# Altium PCB PCB1.PcbDoc
Units mm, origin at the board's own origin, x right, y up, seen from the top; angles counter-clockwise.
Board outline 75 x 14 mm, 4 copper layers (Top, Gnd, Power, Bottom), stack 0.828 mm thick; 26 components, 13 nets, 144 pads, 0 vias.
Unrouted connection lines stored in the file: 61.
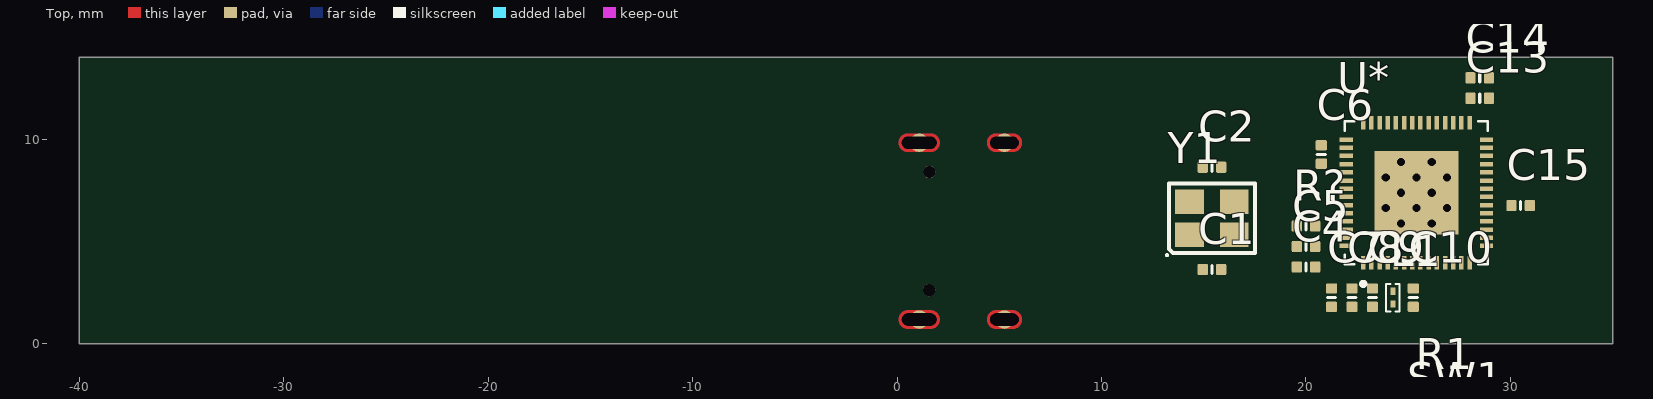
[diagram p0: Top view]
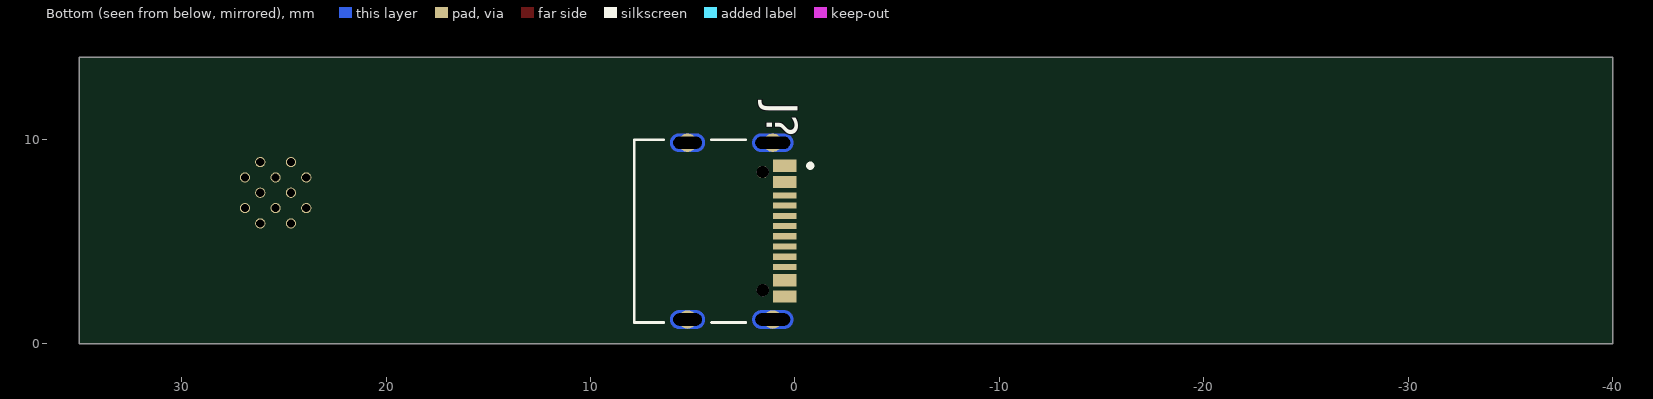
[diagram p1: Bottom view, seen from below]

## Layer stack, top to bottom
Top Solder: solder mask 0.0102, Solder Resist, Dk 4
Top: signal copper 0.0203
Dielectric 2: prepreg 0.2032, PP-006, Dk 4.39
Gnd: signal copper 0.0305
Dielectric 1: dielectric 0.32, FR-4, Dk 4.43
Power: signal copper 0.0305
Dielectric 3: prepreg 0.2032, PP-006, Dk 4.39
Bottom: signal copper 0.0203
Bottom Solder: solder mask 0.0102, Solder Resist, Dk 4

## Board outline
-40,0 35,0 35,14 -40,14

## Design rules (kind name [scope] priority, off if disabled: settings)
Clearance [All] p1: gap=0.254 ignorepadtopadclearanceinfootprint=FALSE except(0: Arc-Hole Track-Hole SMDPad-Hole THPad-Hole Via-Hole Fill-Hole Poly-Hole Region-Hole Text-Hole)
PolygonConnect [All] p1: connectstyle=Relief reliefconductorwidth=0.254 reliefentries=4 polygonreliefangle="90 Angle" airgapwidth=0.254
RoomDefinition Components [InComponentClass('Components')] p1: confinementstyle=ConfineIn formatcopy=TRUE lockcomponents=FALSE outline -140,-80 -89.2,-80 -89.2,-54.6 -140,-54.6
RoutingVias [All] p1: holewidth=0.711 width=1.27 viastyle="Through Hole" minholewidth=0.711 minwidth=1.27 maxholewidth=0.711 maxwidth=1.27
SolderMaskExpansion [All] p1: expansion=0.102 istentingtop=FALSE
Width [All] p1: maxlimit=0.254 minlimit=0.254 preferedwidth=0.254
30 further rules are at their usual default settings.

## Classes and differential pairs
component class Components: J? U?

## Components (designator, comment, footprint, x,y, rotation, side; value= is the part's Value field where it differs from the comment)
C1 "Capacitor 12pF +/-10% 50V 0402" CAPC0402(1005)33_L 15.401,3.627 r0 top value=12pF
C2 "Capacitor 12pF +/-10% 50V 0402" CAPC0402(1005)33_L 15.401,8.627 r0 top value=12pF
C3 "Capacitor 1µF +/-20% 10V 0402" CAPC0402(1005)60_L 27,-9.5 r0 top value=1µF
C4 "Capacitor 1µF +/-20% 10V 0402" CAPC0402(1005)60_L 20,3.75 r180 top value=1µF
C5 "Capacitor 100nF +/-20% 10V 0402" CAPC0402(1005)60_L 20,4.75 r180 top value=100nF
C6 "Capacitor 1µF +/-20% 10V 0402" CAPC0402(1005)60_L 20.75,9.25 r90 top value=1µF
C7 "Capacitor 10µF +/-40% 6.3V 0402" CAPC0402(1005)60_L 21.25,2.25 r270 top value=10µF
C8 "Capacitor 1µF +/-20% 10V 0402" CAPC0402(1005)60_L 22.25,2.25 r270 top value=1µF
C9 "Capacitor 100nF +/-20% 10V 0402" CAPC0402(1005)60_L 23.25,2.25 r270 top value=100nF
C10 "Capacitor 100nF +/-20% 10V 0402" CAPC0402(1005)60_L 25.25,2.25 r270 top value=100nF
C11 "Capacitor 0.1 uF +/- 5% 16 V 0402" CAPC1005X56X25LL10T15 -5.75,17.25 r90 top value=3.3pF
C12 "Capacitor 0.1 uF +/- 5% 16 V 0402" CAPC1005X56X25LL10T15 -3.5,17.25 r90 top value=3.3pF
C13 "Capacitor 1µF +/-20% 10V 0402" CAPC0402(1005)60_L 28.5,12 r0 top value=1µF
C14 "Capacitor 100nF +/-20% 10V 0402" CAPC0402(1005)60_L 28.5,13 r0 top value=100nF
C15 "Capacitor 100nF +/-20% 10V 0402" CAPC0402(1005)60_L 30.5,6.75 r0 top value=100nF
E1 "2450AT18A100E" JT-2450AT18A100-2_V -9.5,18.75 r90 top
J? "TYPE-C-31-M-12" HRO_TYPE-C-31-M-12 5.25,5.5 r270 bottom
L1 "2 nH" "IND 0201_0603" 24.25,2.25 r270 top
L2 "2nH" "IND 0201_0603" -4.5,19 r0 top value="2 nH"
R1 "10KR2F" RESC0402(1005)_L 26,-2.5 r180 top value=10k
R? "0R2J" RESC0402(1005)_L 20,5.75 r0 top value=0
SW1 "PTS810SJM250SMTRLFS" FP-PTS810SJM250SMTRLFS-MFG 26.5,-6 r90 top
SW2 "PTS810SJM250SMTRLFS" FP-PTS810SJM250SMTRLFS-MFG 45.217,-19.163 r90 top
U* "ESP32-S3FN8" PCBComponent_1 25.401,7.377 r90 top
U? "AP2112K-3.3TRG1" FP-SOT25-IPC_A 39.5,22.25 r0 top
Y1 "40 MHz" "NDK NX3225SA" 15.401,6.127 r0 top

## Footprints (in the part's own frame and the unit in brackets; to place one, negate y for a bottom-side part, rotate by r counter-clockwise, add the part's x,y. Pads: shape width x height; smd on the part's side, far side on the other; paste and mask are expansions set on the pad)
CAPC0402(1005)33_L [mm] "Chip Capacitor, Body 1.0x0.5mm, Height 0.33mm, IPC High Density"
  rrect25% 0.5x0.55 smd: 1(-0.45,0) 2(0.45,0)
  silkscreen extent 0,-0.2 0,0.2, body extent -0.5,-0.25 0.5,0.25, height 0.55
CAPC0402(1005)60_L [mm] "Chip Capacitor, Body 1.0x0.5mm, Height 0.6mm, IPC High Density"
  rrect25% 0.5x0.55 smd: 1(-0.45,0) 2(0.45,0)
  silkscreen extent 0,-0.2 0,0.2, body extent -0.5,-0.25 0.5,0.25, height 0.6
CAPC1005X56X25LL10T15 [mm] "Chip Capacitor, 2-Leads, Body 1.10x0.60mm, IPC High Density"
  rect 0.58x0.54 smd: 1(-0.39,0) 2(0.39,0)
  body extent -0.55,-0.3 0.55,0.3, height 0.56
FP-PTS810SJM250SMTRLFS-MFG [mm]
  rect 1.05x0.65 smd paste+0 mask+0: 1(-2.075,1.075) 2(2.075,1.075) 3(-2.075,-1.075) 4(2.075,-1.075)
  silkscreen extent -3.27,-1.6 2.1,1.6, body extent -2.7,-1.7 2.7,1.7, height 0.25
FP-SOT25-IPC_A [mm]
  rect 1.707x0.616 smd paste+0 mask+0: 1(-1.201,0.95)
  rrect100% 1.707x0.616 smd paste+0 mask+0: 2(-1.201,0) 3(-1.201,-0.95) 4(1.201,-0.95) 5(1.201,0.95)
  silkscreen extent -3.08,-1.75 1.4,1.75, body extent -2.55,-2 2.55,2, height 0.25
HRO_TYPE-C-31-M-12 [mm]
  rect 0.6x1.14 smd mask+0.05: A1/B12(-3.2,4.75) A4/B9(-2.4,4.75) B1/A12(3.2,4.75) B4/A9(2.4,4.75)
  rect 0.3x1.14 smd mask+0.05: A5(-1.25,4.75) A6(-0.25,4.75) A7(0.25,4.75) A8(1.25,4.75) B5(1.75,4.75) B6(0.75,4.75) B7(-0.75,4.75) B8(-1.75,4.75)
  round 0.9 hole 0.6 slot 1.7 at 90 deg mask+0: S1(-4.325,4.17) S2(4.325,4.17)
  round 0.9 hole 0.6 slot 1.4 at 90 deg mask+0: S3(-4.325,0) S4(4.325,0)
  round 0.6 hole 0.6 unplated: ""(-2.89,3.68) ""(2.89,3.68)
  Top region: -4.301,5.169 -4.278,5.168 -4.255,5.164 -4.231,5.16 -4.209,5.155 -4.186,5.148 -4.164,5.14 -4.142,5.131 -4.121,5.121 -4.1,5.11 -4.08,5.097 -4.06,5.084 -4.042,5.07 -4.024,5.054 -4.007,5.038 -3.991,5.021 -3.975,5.003 -3.961,4.985 -3.948,4.965 -3.935,4.945 -3.924,4.924 -3.914,4.903 -3.905,4.881 -3.897,4.859 -3.89,4.836 -3.885,4.814 -3.881,4.79 -3.877,4.767 -3.876,4.744 -3.875,4.72 -3.875,3.62 -3.876,3.596 -3.877,3.573 -3.881,3.55 -3.885,3.526 -3.89,3.504 -3.897,3.481 -3.905,3.459 -3.914,3.437 -3.924,3.416 -3.935,3.395 -3.948,3.375 -3.961,3.355 -3.975,3.337 -3.991,3.319 -4.007,3.302 -4.024,3.286 -4.042,3.27 -4.06,3.256 -4.08,3.243 -4.1,3.23 -4.121,3.219 -4.142,3.209 -4.164,3.2 -4.186,3.192 -4.209,3.185 -4.231,3.18 -4.255,3.176 -4.278,3.172 -4.301,3.171 -4.325,3.17 -4.349,3.171 -4.372,3.172 -4.395,3.176 -4.419,3.18 -4.441,3.185 -4.464,3.192 -4.486,3.2 -4.508,3.209 -4.529,3.219 -4.55,3.23 -4.57,3.243 -4.59,3.256 -4.608,3.27 -4.626,3.286 -4.643,3.302 -4.659,3.319 -4.675,3.337 -4.689,3.355 -4.702,3.375 -4.715,3.395 -4.726,3.416 -4.736,3.437 -4.745,3.459 -4.753,3.481 -4.76,3.504 -4.765,3.526 -4.769,3.55 -4.773,3.573 -4.774,3.596 -4.775,3.62 -4.775,4.72 -4.774,4.744 -4.773,4.767 -4.769,4.79 -4.765,4.814 -4.76,4.836 -4.753,4.859 -4.745,4.881 -4.736,4.903 -4.726,4.924 -4.715,4.945 -4.702,4.965 -4.689,4.985 -4.675,5.003 -4.659,5.021 -4.643,5.038 -4.626,5.054 -4.608,5.07 -4.59,5.084 -4.57,5.097 -4.55,5.11 -4.529,5.121 -4.508,5.131 -4.486,5.14 -4.464,5.148 -4.441,5.155 -4.419,5.16 -4.395,5.164 -4.372,5.168 -4.349,5.169 -4.325,5.17
  Top region: 4.349,5.169 4.372,5.168 4.395,5.164 4.419,5.16 4.441,5.155 4.464,5.148 4.486,5.14 4.508,5.131 4.529,5.121 4.55,5.11 4.57,5.097 4.59,5.084 4.608,5.07 4.626,5.054 4.643,5.038 4.659,5.021 4.675,5.003 4.689,4.985 4.702,4.965 4.715,4.945 4.726,4.924 4.736,4.903 4.745,4.881 4.753,4.859 4.76,4.836 4.765,4.814 4.769,4.79 4.773,4.767 4.774,4.744 4.775,4.72 4.775,3.62 4.774,3.596 4.773,3.573 4.769,3.55 4.765,3.526 4.76,3.504 4.753,3.481 4.745,3.459 4.736,3.437 4.726,3.416 4.715,3.395 4.702,3.375 4.689,3.355 4.675,3.337 4.659,3.319 4.643,3.302 4.626,3.286 4.608,3.27 4.59,3.256 4.57,3.243 4.55,3.23 4.529,3.219 4.508,3.209 4.486,3.2 4.464,3.192 4.441,3.185 4.419,3.18 4.395,3.176 4.372,3.172 4.349,3.171 4.325,3.17 4.301,3.171 4.278,3.172 4.255,3.176 4.231,3.18 4.209,3.185 4.186,3.192 4.164,3.2 4.142,3.209 4.121,3.219 4.1,3.23 4.08,3.243 4.06,3.256 4.042,3.27 4.024,3.286 4.007,3.302 3.991,3.319 3.975,3.337 3.961,3.355 3.948,3.375 3.935,3.395 3.924,3.416 3.914,3.437 3.905,3.459 3.897,3.481 3.89,3.504 3.885,3.526 3.881,3.55 3.877,3.573 3.876,3.596 3.875,3.62 3.875,4.72 3.876,4.744 3.877,4.767 3.881,4.79 3.885,4.814 3.89,4.836 3.897,4.859 3.905,4.881 3.914,4.903 3.924,4.924 3.935,4.945 3.948,4.965 3.961,4.985 3.975,5.003 3.991,5.021 4.007,5.038 4.024,5.054 4.042,5.07 4.06,5.084 4.08,5.097 4.1,5.11 4.121,5.121 4.142,5.131 4.164,5.14 4.186,5.148 4.209,5.155 4.231,5.16 4.255,5.164 4.278,5.168 4.301,5.169 4.325,5.17
  Top region: -4.301,0.849 -4.278,0.848 -4.255,0.844 -4.231,0.84 -4.209,0.835 -4.186,0.828 -4.164,0.82 -4.142,0.811 -4.121,0.801 -4.1,0.79 -4.08,0.777 -4.06,0.764 -4.042,0.75 -4.024,0.734 -4.007,0.718 -3.991,0.701 -3.975,0.683 -3.961,0.665 -3.948,0.645 -3.935,0.625 -3.924,0.604 -3.914,0.583 -3.905,0.561 -3.897,0.539 -3.89,0.516 -3.885,0.494 -3.881,0.47 -3.877,0.447 -3.876,0.424 -3.875,0.4 -3.875,-0.4 -3.876,-0.424 -3.877,-0.447 -3.881,-0.47 -3.885,-0.494 -3.89,-0.516 -3.897,-0.539 -3.905,-0.561 -3.914,-0.583 -3.924,-0.604 -3.935,-0.625 -3.948,-0.645 -3.961,-0.665 -3.975,-0.683 -3.991,-0.701 -4.007,-0.718 -4.024,-0.734 -4.042,-0.75 -4.06,-0.764 -4.08,-0.777 -4.1,-0.79 -4.121,-0.801 -4.142,-0.811 -4.164,-0.82 -4.186,-0.828 -4.209,-0.835 -4.231,-0.84 -4.255,-0.844 -4.278,-0.848 -4.301,-0.849 -4.325,-0.85 -4.349,-0.849 -4.372,-0.848 -4.395,-0.844 -4.419,-0.84 -4.441,-0.835 -4.464,-0.828 -4.486,-0.82 -4.508,-0.811 -4.529,-0.801 -4.55,-0.79 -4.57,-0.777 -4.59,-0.764 -4.608,-0.75 -4.626,-0.734 -4.643,-0.718 -4.659,-0.701 -4.675,-0.683 -4.689,-0.665 -4.702,-0.645 -4.715,-0.625 -4.726,-0.604 -4.736,-0.583 -4.745,-0.561 -4.753,-0.539 -4.76,-0.516 -4.765,-0.494 -4.769,-0.47 -4.773,-0.447 -4.774,-0.424 -4.775,-0.4 -4.775,0.4 -4.774,0.424 -4.773,0.447 -4.769,0.47 -4.765,0.494 -4.76,0.516 -4.753,0.539 -4.745,0.561 -4.736,0.583 -4.726,0.604 -4.715,0.625 -4.702,0.645 -4.689,0.665 -4.675,0.683 -4.659,0.701 -4.643,0.718 -4.626,0.734 -4.608,0.75 -4.59,0.764 -4.57,0.777 -4.55,0.79 -4.529,0.801 -4.508,0.811 -4.486,0.82 -4.464,0.828 -4.441,0.835 -4.419,0.84 -4.395,0.844 -4.372,0.848 -4.349,0.849 -4.325,0.85
  Top region: 4.349,0.849 4.372,0.848 4.395,0.844 4.419,0.84 4.441,0.835 4.464,0.828 4.486,0.82 4.508,0.811 4.529,0.801 4.55,0.79 4.57,0.777 4.59,0.764 4.608,0.75 4.626,0.734 4.643,0.718 4.659,0.701 4.675,0.683 4.689,0.665 4.702,0.645 4.715,0.625 4.726,0.604 4.736,0.583 4.745,0.561 4.753,0.539 4.76,0.516 4.765,0.494 4.769,0.47 4.773,0.447 4.774,0.424 4.775,0.4 4.775,-0.4 4.774,-0.424 4.773,-0.447 4.769,-0.47 4.765,-0.494 4.76,-0.516 4.753,-0.539 4.745,-0.561 4.736,-0.583 4.726,-0.604 4.715,-0.625 4.702,-0.645 4.689,-0.665 4.675,-0.683 4.659,-0.701 4.643,-0.718 4.626,-0.734 4.608,-0.75 4.59,-0.764 4.57,-0.777 4.55,-0.79 4.529,-0.801 4.508,-0.811 4.486,-0.82 4.464,-0.828 4.441,-0.835 4.419,-0.84 4.395,-0.844 4.372,-0.848 4.349,-0.849 4.325,-0.85 4.301,-0.849 4.278,-0.848 4.255,-0.844 4.231,-0.84 4.209,-0.835 4.186,-0.828 4.164,-0.82 4.142,-0.811 4.121,-0.801 4.1,-0.79 4.08,-0.777 4.06,-0.764 4.042,-0.75 4.024,-0.734 4.007,-0.718 3.991,-0.701 3.975,-0.683 3.961,-0.665 3.948,-0.645 3.935,-0.625 3.924,-0.604 3.914,-0.583 3.905,-0.561 3.897,-0.539 3.89,-0.516 3.885,-0.494 3.881,-0.47 3.877,-0.447 3.876,-0.424 3.875,-0.4 3.875,0.4 3.876,0.424 3.877,0.447 3.881,0.47 3.885,0.494 3.89,0.516 3.897,0.539 3.905,0.561 3.914,0.583 3.924,0.604 3.935,0.625 3.948,0.645 3.961,0.665 3.975,0.683 3.991,0.701 4.007,0.718 4.024,0.734 4.042,0.75 4.06,0.764 4.08,0.777 4.1,0.79 4.121,0.801 4.142,0.811 4.164,0.82 4.186,0.828 4.209,0.835 4.231,0.84 4.255,0.844 4.278,0.848 4.301,0.849 4.325,0.85
  Bottom region: -4.301,5.169 -4.278,5.168 -4.255,5.164 -4.231,5.16 -4.209,5.155 -4.186,5.148 -4.164,5.14 -4.142,5.131 -4.121,5.121 -4.1,5.11 -4.08,5.097 -4.06,5.084 -4.042,5.07 -4.024,5.054 -4.007,5.038 -3.991,5.021 -3.975,5.003 -3.961,4.985 -3.948,4.965 -3.935,4.945 -3.924,4.924 -3.914,4.903 -3.905,4.881 -3.897,4.859 -3.89,4.836 -3.885,4.814 -3.881,4.79 -3.877,4.767 -3.876,4.744 -3.875,4.72 -3.875,3.62 -3.876,3.596 -3.877,3.573 -3.881,3.55 -3.885,3.526 -3.89,3.504 -3.897,3.481 -3.905,3.459 -3.914,3.437 -3.924,3.416 -3.935,3.395 -3.948,3.375 -3.961,3.355 -3.975,3.337 -3.991,3.319 -4.007,3.302 -4.024,3.286 -4.042,3.27 -4.06,3.256 -4.08,3.243 -4.1,3.23 -4.121,3.219 -4.142,3.209 -4.164,3.2 -4.186,3.192 -4.209,3.185 -4.231,3.18 -4.255,3.176 -4.278,3.172 -4.301,3.171 -4.325,3.17 -4.349,3.171 -4.372,3.172 -4.395,3.176 -4.419,3.18 -4.441,3.185 -4.464,3.192 -4.486,3.2 -4.508,3.209 -4.529,3.219 -4.55,3.23 -4.57,3.243 -4.59,3.256 -4.608,3.27 -4.626,3.286 -4.643,3.302 -4.659,3.319 -4.675,3.337 -4.689,3.355 -4.702,3.375 -4.715,3.395 -4.726,3.416 -4.736,3.437 -4.745,3.459 -4.753,3.481 -4.76,3.504 -4.765,3.526 -4.769,3.55 -4.773,3.573 -4.774,3.596 -4.775,3.62 -4.775,4.72 -4.774,4.744 -4.773,4.767 -4.769,4.79 -4.765,4.814 -4.76,4.836 -4.753,4.859 -4.745,4.881 -4.736,4.903 -4.726,4.924 -4.715,4.945 -4.702,4.965 -4.689,4.985 -4.675,5.003 -4.659,5.021 -4.643,5.038 -4.626,5.054 -4.608,5.07 -4.59,5.084 -4.57,5.097 -4.55,5.11 -4.529,5.121 -4.508,5.131 -4.486,5.14 -4.464,5.148 -4.441,5.155 -4.419,5.16 -4.395,5.164 -4.372,5.168 -4.349,5.169 -4.325,5.17
  Bottom region: 4.349,5.169 4.372,5.168 4.395,5.164 4.419,5.16 4.441,5.155 4.464,5.148 4.486,5.14 4.508,5.131 4.529,5.121 4.55,5.11 4.57,5.097 4.59,5.084 4.608,5.07 4.626,5.054 4.643,5.038 4.659,5.021 4.675,5.003 4.689,4.985 4.702,4.965 4.715,4.945 4.726,4.924 4.736,4.903 4.745,4.881 4.753,4.859 4.76,4.836 4.765,4.814 4.769,4.79 4.773,4.767 4.774,4.744 4.775,4.72 4.775,3.62 4.774,3.596 4.773,3.573 4.769,3.55 4.765,3.526 4.76,3.504 4.753,3.481 4.745,3.459 4.736,3.437 4.726,3.416 4.715,3.395 4.702,3.375 4.689,3.355 4.675,3.337 4.659,3.319 4.643,3.302 4.626,3.286 4.608,3.27 4.59,3.256 4.57,3.243 4.55,3.23 4.529,3.219 4.508,3.209 4.486,3.2 4.464,3.192 4.441,3.185 4.419,3.18 4.395,3.176 4.372,3.172 4.349,3.171 4.325,3.17 4.301,3.171 4.278,3.172 4.255,3.176 4.231,3.18 4.209,3.185 4.186,3.192 4.164,3.2 4.142,3.209 4.121,3.219 4.1,3.23 4.08,3.243 4.06,3.256 4.042,3.27 4.024,3.286 4.007,3.302 3.991,3.319 3.975,3.337 3.961,3.355 3.948,3.375 3.935,3.395 3.924,3.416 3.914,3.437 3.905,3.459 3.897,3.481 3.89,3.504 3.885,3.526 3.881,3.55 3.877,3.573 3.876,3.596 3.875,3.62 3.875,4.72 3.876,4.744 3.877,4.767 3.881,4.79 3.885,4.814 3.89,4.836 3.897,4.859 3.905,4.881 3.914,4.903 3.924,4.924 3.935,4.945 3.948,4.965 3.961,4.985 3.975,5.003 3.991,5.021 4.007,5.038 4.024,5.054 4.042,5.07 4.06,5.084 4.08,5.097 4.1,5.11 4.121,5.121 4.142,5.131 4.164,5.14 4.186,5.148 4.209,5.155 4.231,5.16 4.255,5.164 4.278,5.168 4.301,5.169 4.325,5.17
  Bottom region: -4.301,0.849 -4.278,0.848 -4.255,0.844 -4.231,0.84 -4.209,0.835 -4.186,0.828 -4.164,0.82 -4.142,0.811 -4.121,0.801 -4.1,0.79 -4.08,0.777 -4.06,0.764 -4.042,0.75 -4.024,0.734 -4.007,0.718 -3.991,0.701 -3.975,0.683 -3.961,0.665 -3.948,0.645 -3.935,0.625 -3.924,0.604 -3.914,0.583 -3.905,0.561 -3.897,0.539 -3.89,0.516 -3.885,0.494 -3.881,0.47 -3.877,0.447 -3.876,0.424 -3.875,0.4 -3.875,-0.4 -3.876,-0.424 -3.877,-0.447 -3.881,-0.47 -3.885,-0.494 -3.89,-0.516 -3.897,-0.539 -3.905,-0.561 -3.914,-0.583 -3.924,-0.604 -3.935,-0.625 -3.948,-0.645 -3.961,-0.665 -3.975,-0.683 -3.991,-0.701 -4.007,-0.718 -4.024,-0.734 -4.042,-0.75 -4.06,-0.764 -4.08,-0.777 -4.1,-0.79 -4.121,-0.801 -4.142,-0.811 -4.164,-0.82 -4.186,-0.828 -4.209,-0.835 -4.231,-0.84 -4.255,-0.844 -4.278,-0.848 -4.301,-0.849 -4.325,-0.85 -4.349,-0.849 -4.372,-0.848 -4.395,-0.844 -4.419,-0.84 -4.441,-0.835 -4.464,-0.828 -4.486,-0.82 -4.508,-0.811 -4.529,-0.801 -4.55,-0.79 -4.57,-0.777 -4.59,-0.764 -4.608,-0.75 -4.626,-0.734 -4.643,-0.718 -4.659,-0.701 -4.675,-0.683 -4.689,-0.665 -4.702,-0.645 -4.715,-0.625 -4.726,-0.604 -4.736,-0.583 -4.745,-0.561 -4.753,-0.539 -4.76,-0.516 -4.765,-0.494 -4.769,-0.47 -4.773,-0.447 -4.774,-0.424 -4.775,-0.4 -4.775,0.4 -4.774,0.424 -4.773,0.447 -4.769,0.47 -4.765,0.494 -4.76,0.516 -4.753,0.539 -4.745,0.561 -4.736,0.583 -4.726,0.604 -4.715,0.625 -4.702,0.645 -4.689,0.665 -4.675,0.683 -4.659,0.701 -4.643,0.718 -4.626,0.734 -4.608,0.75 -4.59,0.764 -4.57,0.777 -4.55,0.79 -4.529,0.801 -4.508,0.811 -4.486,0.82 -4.464,0.828 -4.441,0.835 -4.419,0.84 -4.395,0.844 -4.372,0.848 -4.349,0.849 -4.325,0.85
  Bottom region: 4.349,0.849 4.372,0.848 4.395,0.844 4.419,0.84 4.441,0.835 4.464,0.828 4.486,0.82 4.508,0.811 4.529,0.801 4.55,0.79 4.57,0.777 4.59,0.764 4.608,0.75 4.626,0.734 4.643,0.718 4.659,0.701 4.675,0.683 4.689,0.665 4.702,0.645 4.715,0.625 4.726,0.604 4.736,0.583 4.745,0.561 4.753,0.539 4.76,0.516 4.765,0.494 4.769,0.47 4.773,0.447 4.774,0.424 4.775,0.4 4.775,-0.4 4.774,-0.424 4.773,-0.447 4.769,-0.47 4.765,-0.494 4.76,-0.516 4.753,-0.539 4.745,-0.561 4.736,-0.583 4.726,-0.604 4.715,-0.625 4.702,-0.645 4.689,-0.665 4.675,-0.683 4.659,-0.701 4.643,-0.718 4.626,-0.734 4.608,-0.75 4.59,-0.764 4.57,-0.777 4.55,-0.79 4.529,-0.801 4.508,-0.811 4.486,-0.82 4.464,-0.828 4.441,-0.835 4.419,-0.84 4.395,-0.844 4.372,-0.848 4.349,-0.849 4.325,-0.85 4.301,-0.849 4.278,-0.848 4.255,-0.844 4.231,-0.84 4.209,-0.835 4.186,-0.828 4.164,-0.82 4.142,-0.811 4.121,-0.801 4.1,-0.79 4.08,-0.777 4.06,-0.764 4.042,-0.75 4.024,-0.734 4.007,-0.718 3.991,-0.701 3.975,-0.683 3.961,-0.665 3.948,-0.645 3.935,-0.625 3.924,-0.604 3.914,-0.583 3.905,-0.561 3.897,-0.539 3.89,-0.516 3.885,-0.494 3.881,-0.47 3.877,-0.447 3.876,-0.424 3.875,-0.4 3.875,0.4 3.876,0.424 3.877,0.447 3.881,0.47 3.885,0.494 3.89,0.516 3.897,0.539 3.905,0.561 3.914,0.583 3.924,0.604 3.935,0.625 3.948,0.645 3.961,0.665 3.975,0.683 3.991,0.701 4.007,0.718 4.024,0.734 4.042,0.75 4.06,0.764 4.08,0.777 4.1,0.79 4.121,0.801 4.142,0.811 4.164,0.82 4.186,0.828 4.209,0.835 4.231,0.84 4.255,0.844 4.278,0.848 4.301,0.849 4.325,0.85
  silkscreen extent -4.47,-2.6 4.47,6.1, body extent -4.47,-2.6 4.47,5.31, height 3.31
"IND 0201_0603" [mm] "Inductor, 2-Leads, Body 0.60x0.30mm, IPC Medium Density"
  rect 0.35x0.25 smd: 1(-0.31,0) 2(0.31,0)
  silkscreen extent -0.67,-0.33 0.67,0.33, body extent -0.3,-0.15 0.3,0.15, height 0.3
JT-2450AT18A100-2_V [mm] "Chip Antenna, 2-Leads, Body 3.4x1.8mm"
  rect 0.8x1.6 smd: 1(-1.7,0) 2(1.7,0)
  silkscreen extent -2.77,-0.9 0.91,0.9, body extent -1.7,-0.9 1.7,0.9, height 1.4
"NDK NX3225SA" [mm] "Crystal, 4-Leads, Body 2.50x3.20mm, Pitch 2.20mm, IPC Medium Density"
  rect 1.4x1.2 smd: 1(-1.1,-0.8) 2(1.1,-0.8) 3(1.1,0.8) 4(-1.1,0.8)
  silkscreen extent -2.25,-1.85 2.1,1.7, body extent -1.61,-1.26 1.61,1.26, height 0.6
PCBComponent_1 [mm]
  rect 0.65x0.22 smd mask+0.05: 1(-3.425,2.6) 2(-3.425,2.2) 3(-3.425,1.8) 4(-3.425,1.4) 5(-3.425,1) 6(-3.425,0.6) 7(-3.425,0.2) 8(-3.425,-0.2) 9(-3.425,-0.6) 10(-3.425,-1) 11(-3.425,-1.4) 12(-3.425,-1.8) 13(-3.425,-2.2) 14(-3.425,-2.6) 29(3.425,-2.6) 30(3.425,-2.2) 31(3.425,-1.8) 32(3.425,-1.4) 33(3.425,-1) 34(3.425,-0.6) 35(3.425,-0.2) 36(3.425,0.2) 37(3.425,0.6) 38(3.425,1) 39(3.425,1.4) 40(3.425,1.8) 41(3.425,2.2) 42(3.425,2.6)
  rect 0.22x0.65 smd mask+0.05: 15(-2.6,-3.425) 16(-2.2,-3.425) 17(-1.8,-3.425) 18(-1.4,-3.425) 19(-1,-3.425) 20(-0.6,-3.425) 21(-0.2,-3.425) 22(0.2,-3.425) 23(0.6,-3.425) 24(1,-3.425) 25(1.4,-3.425) 26(1.8,-3.425) 27(2.2,-3.425) 28(2.6,-3.425) 43(2.6,3.425) 44(2.2,3.425) 45(1.8,3.425) 46(1.4,3.425) 47(1,3.425) 48(0.6,3.425) 49(0.2,3.425) 50(-0.2,3.425) 51(-0.6,3.425) 52(-1,3.425) 53(-1.4,3.425) 54(-1.8,3.425) 55(-2.2,3.425) 56(-2.6,3.425)
  rect 4.1x4.1 smd paste-1.55: 57(0,0)
  round 0.5 hole 0.4 mask+0: 58(-0.75,1.5) 59(0.75,1.5) 60(-1.5,0.75) 61(0,0.75) 62(1.5,0.75) 63(-0.75,0) 64(0.75,0) 65(-1.5,-0.75) 66(0,-0.75) 67(1.5,-0.75) 68(-0.75,-1.5) 69(0.75,-1.5)
  silkscreen extent -4.55,-3.5 3.5,3.5, body extent -3.47,-3.54 3.53,3.46, height 1.02
RESC0402(1005)_L [mm] "Chip Resistor, Body 1.0x0.5mm, IPC High Density"
  rrect25% 0.5x0.55 smd: 1(-0.45,0) 2(0.45,0)
  silkscreen extent 0,-0.2 0,0.2, body extent -0.5,-0.25 0.5,0.25, height 0.3

## Part data
C1 C2: library part CMP-001-00072-4, "Chip Capacitor, 12pF +/-10%, 50V, 0402, Thickness 0.33 mm", Case/Package=0402, Max Operating Temperature=85°C, Min Operating Temperature=-55°C, Tolerance=20%, Voltage Rating=50V, Mounting Technology=SMT, Pins=2
C3 C4 C6 C8 C13: library part CMP-001-00063-3, "Chip Capacitor, 1µF +/-20%, 10V, 0402, Thickness 0.6 mm", Case/Package=0402, Max Operating Temperature=85°C, Min Operating Temperature=-55°C, Tolerance=10%, Voltage Rating=10V, Mounting Technology=SMT, Pins=2
C5 C9 C10 C14 C15: library part CMP-001-00061-3, "Chip Capacitor, 100nF +/-20%, 10V, 0402, Thickness 0.6 mm", Case/Package=0402, Max Operating Temperature=85°C, Min Operating Temperature=-55°C, Tolerance=20%, Voltage Rating=10V, Mounting Technology=SMT, Pins=2
C7: library part CMP-001-00074-3, "Chip Capacitor, 10µF +/-40%, 6.3V, 0402, Thickness 0.6 mm", Case/Package=0402, Max Operating Temperature=85°C, Min Operating Temperature=-55°C, Tolerance=10%, Voltage Rating=6.3V, Mounting Technology=SMT, Pins=2
C11 C12: library part CMP-001-00001-6, "Chip Capacitor, 0.1 uF, +/- 5%, 16 V, 0402 (1005 Metric)", Capacitor Type=Ceramic, Case/Package=0402, Max Operating Temperature=125°C, Min Operating Temperature=-55°C, Tolerance=5%, Voltage Rating=16V, Mounting Technology=SM, Pins=2, RoHS Compliant=True
E1: library part CMP-2000-05167-1, "Ceramic Antenna, 2.45 GHZ, 2 W, -40 to 125 degC, 2-Pin SMD, RoHS, Tape and Reel", Manufacturer="Johanson Technology", Maximum Frequency=2500MHz, Minimum Frequency=2400MHz, Package=2Case18-4, Category=Antenna, Datasheet URL=http://www.johansontechnology.com/datasheets/antennas/2450AT18A100.pdf, Datasheet Version="Rev. 1.3, 07/2014", Manufacturer URL=https://www.johansontechnology.com/, Type=Ceramic, Typical Antenna Gain=0.5dB
J?: library part CMP-005-000001-1, "USB Connectors 24 Receptacle 1 8.94*7.3mm RoHS", Package=Package, Availability="Not in stock", Check_prices=https://www.snapeda.com/parts/TYPE-C-31-M-12/HRO+Electronics+Co.%252C+Ltd./view-part/?ref=eda, Component Type=Standard, Design Item ID=TYPE-C-31-M-12, MF="HRO Electronics Co., Ltd.", MP=TYPE-C-31-M-12, Pin Count=16, Price=None, SnapEDA_Link=https://www.snapeda.com/parts/TYPE-C-31-M-12/HRO+Electronics+Co.%252C+Ltd./view-part/?ref=snap, Source=TYPE-C-31-M-12.SchLib
L1: library part WLCM0603TGB2N0TB, "INDUCTOR FIXED 2.0NH 0201", Current Rating (Amps)="450 mA", DC Resistance (DCR)="200mOhm Max", Device Package="0201 (0603 Metric)", Frequency - Self Resonant=12.5GHz, Inductance Frequency - Test="500 MHz", Manufacturer="Walsin Technology Corporation", Operating Temperature="-55°C ~ 125°C", Q @ Freq="12 @ 500MHz", Supplier Device Package=0201, Supplier Part Number 1=1292-WLCM0603TGB2N0TBCT-ND, Tolerance=±0.1nH, ComponentLink1Description=Datasheet, ComponentLink1URL=https://www.passivecomponent.com/wp-content/uploads/inductor/WLCM0603TG_Series.pdf, ComponentLink2Description="DigiKey Link", ComponentLink2URL=https://www.digikey.com/en/products/detail/walsin-technology-corporation/WLCM0603TGB2N0TB/14563834, Height - Seated (Max)="0.013\" (0.33mm)", Inductance="2 nH", LastUpdated="1/2/2023 9:01:21 PM", Lifecycle Status=Active, Material - Core=Ceramic, Minimum Order=1, Mounting Type="Surface Mount", Package / Case="0201 (0603 Metric)", Packaging=CutTape, Part Number=WLCM0603TGB2N0TB, Part Status=Active, PartId=3830, Price=0.01, Series=CM, Shielding=Unshielded, Size / Dimension="0.024\" L x 0.012\" W (0.60mm x 0.30mm)", Supplier 1=DigiKey, Type=Multilayer
L2: library part WLCM0603TGB2N0TB, "INDUCTOR FIXED 2.0NH 0201", Current Rating (Amps)="450 mA", DC Resistance (DCR)="200mOhm Max", Device Package="0201 (0603 Metric)", Frequency - Self Resonant=12.5GHz, Inductance="2 nH", Inductance Frequency - Test="500 MHz", Manufacturer="Walsin Technology Corporation", Operating Temperature="-55°C ~ 125°C", Q @ Freq="12 @ 500MHz", Supplier Device Package=0201, Supplier Part Number 1=1292-WLCM0603TGB2N0TBCT-ND, Tolerance=±0.1nH, ComponentLink1Description=Datasheet, ComponentLink1URL=https://www.passivecomponent.com/wp-content/uploads/inductor/WLCM0603TG_Series.pdf, ComponentLink2Description="DigiKey Link", ComponentLink2URL=https://www.digikey.com/en/products/detail/walsin-technology-corporation/WLCM0603TGB2N0TB/14563834, Height - Seated (Max)="0.013\" (0.33mm)", LastUpdated="1/2/2023 9:01:21 PM", Lifecycle Status=Active, Material - Core=Ceramic, Minimum Order=1, Mounting Type="Surface Mount", Package / Case="0201 (0603 Metric)", Packaging=CutTape, Part Number=WLCM0603TGB2N0TB, Part Status=Active, PartId=3830, Price=0.01, Series=CM, Shielding=Unshielded, Size / Dimension="0.024\" L x 0.012\" W (0.60mm x 0.30mm)", Supplier 1=DigiKey, Type=Multilayer
R1: library part CMP-009-00066-2, "10K 0.063W 1% 0402 (1005 Metric)  SMD", Case/Package=0402, Power=63mW, Tolerance=1%, Mounting Technology=SMT, Pins=2
R?: library part CMP-009-00062-2, "Jumper 0402 (1005 Metric)", Case/Package=0402, Mounting Technology=SMT, Pins=2
SW1 SW2: library part CMP-10040-000001-2, "SWITCH TACTILE SPST-NO 0.05A 16V", Case/Package=SMD/SMT, Color=Black, Current Rating=50mA, Max Operating Temperature=85°C, Min Operating Temperature=-40°C, Operating Force=160gf, Package Quantity=2900, Voltage Rating (DC)=16V, Actuator Type=Standard, Contact Plating=Silver, Depth=4.6mm, Illumination Type=Non-Illuminated, Lead Free="Lead Free", Length=3.2mm, Max Current Rating=50mA, Mechanical Life=150000Cycles, Mount="Surface Mount", Orientation=Straight, Packaging="Tape and Reel", RoHS Compliant=Yes, Switch Function=Off-Mom, Switch Travel=0.15mm, Termination=J-Bend, Throw Configuration=SPST
U*: "ESP32 MCU"
U?: library part CMP-12756-000035-1, "IC REG LINEAR 3.3V 600MA SOT25", Case/Package=SOT-23-5, Dropout Voltage=250mV, Max Input Voltage=6V, Max Operating Temperature=85°C, Max Output Current=600mA, Min Input Voltage=2.5V, Min Operating Temperature=-40°C, Output Voltage=3.3V, Package Quantity=1, Quiescent Current=55uA, Accuracy=1.5%, Height=1.3mm, Lead Free="Lead Free", Length=3.1mm, Mount="Surface Mount", Number of Outputs=1, Number of Pins=5, Number of Regulators=1, Output Current=600mA, Output Type=Fixed, Packaging="Tape and Reel", Polarity=Positive, Width=1.7mm
Y1: library part NX3225SA-40M-EXS00A-CS03880, "CRYSTAL 40.0000MHZ 10PF SMD", ESR (Equivalent Series Resistance)="50 Ohms", Frequency Stability=±17ppm, Frequency Tolerance=±10ppm, Load Capacitance=10pF, Manufacturer="NDK America, Inc.", Operating Mode=Fundamental, Operating Temperature="-40°C ~ 85°C", Package / Case="4-SMD, No Lead", Supplier Part Number 1=644-1249-1-ND, ComponentLink1Description=Datasheet, ComponentLink1URL=//media.digikey.com/pdf/Data%20Sheets/NDK%20PDFs/NX3225SA-40M-EXS00A-CS03880.pdf, ComponentLink2Description="DigiKey Link", ComponentLink2URL=https://www.digikey.com/en/products/detail/ndk-america-inc/NX3225SA-40M-EXS00A-CS03880/5015625, Frequency="40 MHz", Height - Seated (Max)="0.024\" (0.60mm)", LastUpdated="1/2/2023 8:58:25 PM", Lifecycle Status=Active, Minimum Order=1, Mounting Type="Surface Mount", Packaging=TapeAndReel, Part Number=NX3225SA-40M-EXS00A-CS03880, Part Status=Active, PartId=586, Price=0.36, Series=NX3225SA, Size / Dimension="0.126\" L x 0.098\" W (3.20mm x 2.50mm)", Supplier 1=DigiKey, Type="MHz Crystal"

## Nets (pads, with @x,y where several pads share a name; then routed paths per layer and width w, separated by ;. In a path a pad name is that pad's centre, name@x,y a point inside that pad or via, vN(x,y) a via of type N, cw(c..) or ccw(c..) an arc to the next point about the centre after c; other vN are vias at no path point)
3V3: C4.1 C5.1 C6.1 C7.1 C8.1 C9.1 C15.1 L1.1 R1.1 U*.20 U*.46 U*.55 U*.56
GND: C1.1 C2.1 C3.2 C4.2 C5.2 C6.2 C7.2 C8.2 C9.2 C10.2 C11.2 C12.2 C13.2 C14.2 C15.2 J?.A1/B12 J?.B1/A12 J?.S1 J?.S2 J?.S3 J?.S4 SW1.3 SW1.4 SW2.3 SW2.4 U*.57 Y1.2 Y1.4
NetC1_2: C1.2 Y1.3
NetC2_2: C2.2 Y1.1
NetC3_1: C3.1 R1.2 SW1.1 SW1.2 U*.4
NetC10_1: C10.1 L1.2 U*.2 U*.3
NetC11_1: C11.1 E1.1 L2.1
NetC12_1: C12.1 L2.2 U*.1
NetC13_1: C13.1 C14.1 U*.29
NetJ?_A6: J?.A6 J?.B6 U*.26
NetJ?_A7: J?.A7 J?.B7 U*.25
NetR?_2: R?.2 U*.54
NetSW2_1: SW2.1 SW2.2 U*.5
pads on no net: E1.2 J?. J?.A4/B9 J?.A5 J?.A8 J?.B4/A9 J?.B5 J?.B8 R?.1 U*.6 U*.7 U*.8 U*.9 U*.10 U*.11 U*.12 U*.13 U*.14 U*.15 U*.16 U*.17 U*.18 U*.19 U*.21 U*.22 U*.23 U*.24 U*.27 U*.28 U*.30 U*.31 U*.32 U*.33 U*.34 U*.35 U*.36 U*.37 U*.38 U*.39 U*.40 U*.41 U*.42 U*.43 U*.44 U*.45 U*.47 U*.48 U*.49 U*.50 U*.51 U*.52 U*.53 U*.58 U*.59 U*.60 U*.61 U*.62 U*.63 U*.64 U*.65 U*.66 U*.67 U*.68 U*.69 U?.1 U?.2 U?.3 U?.4 U?.5

## Text inside footprints (layer, text, board x,y; h text height)
J?: Bottom Assembly "PCB EDGE" at 7.15,0.3 h0.61 r90